# EAGLE board probe_v2 (EAGLE 6.4)
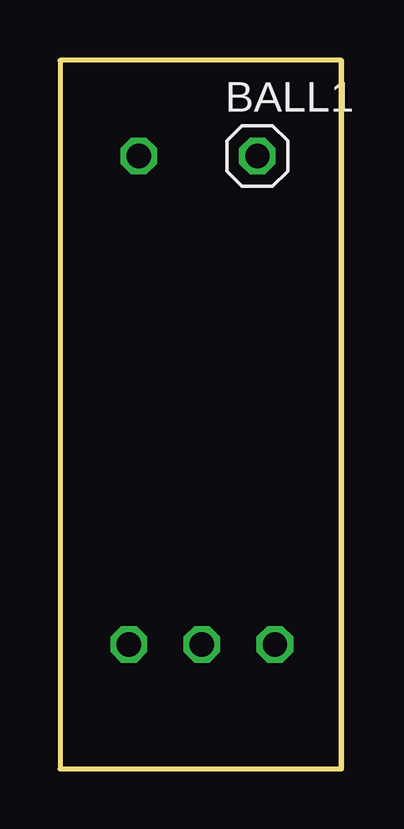
[diagram p0: board, top side]
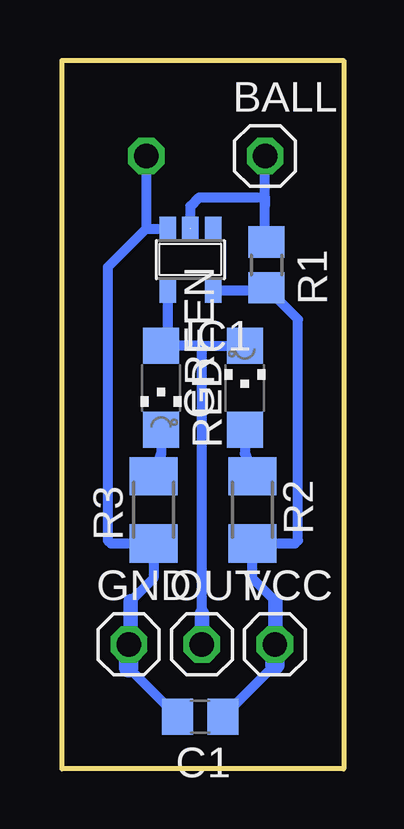
[diagram p1: board, bottom side, seen from below]

Size 11.84 x 29.54 mm. Coordinates in mm from the lower left corner, seen from the top.
Outline: 11.84,0 11.84,29.54 0,29.54 0,0
Copper layers (1*16): Top 0.035mm / dielectric 1.5mm / Bottom 0.035mm
Design rules "default": minimum track width 10mil, minimum drill 24mil, track to track 8mil, track to pad 8mil, pad to pad 8mil, via to via 8mil, smd to smd 8mil, copper to edge 40mil, drill to drill 8mil, minimum pad ring 10mil, minimum via ring 8mil, stop-mask expansion 4mil, vias tented up to drill 0mil, thermal gap 10mil
Net classes: 0 default: width 0.5 mm, drill 0.5 mm, clearance 0.355 mm
Milling: 4 lines

## Footprints (pad centres in the part's own frame; a part is rotated, then mirrored left to right if it is on the bottom)
1X01 = drill 1.016 octagon: 1 0,0
C0805 = smd 1.3 x 1.5: 1 -0.95,0; 2 0.95,0
CHIPLED_1206 = smd 1.5 x 1.5: A 0,-1.75; C 0,1.75
SOT23-5 = smd 0.69 x 0.99: 1 -0.95,-1.29; 2 0,-1.29; 3 0.95,-1.29; 4 0.95,1.3; 5 -0.95,1.3
R0805 = smd 1.3 x 1.5: 1 -0.95,0; 2 0.95,0
M1206 = smd 1.6 x 2: 1 -1.4,0; 2 1.4,0

## Placement (x,y rotation side)
BALL  [1X01]  3.29,25.54 0 bottom
BALL1  [1X01]  8.24,25.54 0 top
C1  [C0805]  5.99,2.17 180 bottom
GND  [1X01]  8.97,5.19 0 bottom
GREEN  [CHIPLED_1206]  4.13,15.88 0 bottom
IC1  74AHC1G14DBV  [SOT23-5]  6.4,21.23 180 bottom
OUT  [1X01]  5.92,5.19 0 bottom
R1  1k  [R0805]  3.22,21 270 bottom
R2  330  [M1206]  3.81,10.79 270 bottom
R3  330  [M1206]  7.94,10.79 90 bottom
RED  [CHIPLED_1206]  7.62,15.88 180 bottom
VCC  [1X01]  2.87,5.19 0 bottom

## Library data of the parts
BALL BALL1 GND OUT VCC = pinhead
C1 R1-R3 = rcl
GREEN RED = led
IC1 = 74xx-little-us

## Nets
BALL: BALL.1 IC1.2 R1.1
GND: BALL1.1 C1.2 GND.1 IC1.3 R3.1
N$1: GREEN.A R2.1
N$2: R3.2 RED.C
OUT: GREEN.C IC1.4 OUT.1 RED.A
VCC: C1.1 IC1.5 R1.2 R2.2 VCC.1

## Tracks (layer width: path | path; a pad name or v marks a point on that pad's centre or on a via)
BALL
  Bottom 0.406: R1.1 3.29,21.95 3.29,23.5 | 3.29,23.5 BALL.1 | IC1.2 6.4,23.45 6.03,23.81 3.29,23.81 3.29,23.5
GND
  Bottom 0.406: C1.2 8.97,4.21 | R3.1 7.94,7.94 8.89,6.99 | 8.89,5.19 GND.1 | BALL1.1 8.24,22.52 | 8.24,22.52 IC1.3 | R3.1 7.94,9.53 | 8.24,22.52 9.84,20.91 9.84,11.11 9.84,9.53 9.71,9.39 R3.1
  Bottom 0.61: 8.89,6.99 8.89,5.19
  Bottom 0.813: 8.97,4.21 GND.1
N$1
  Bottom 0.406: GREEN.A 4.13,13.15 R2.1
N$2
  Bottom 0.406: RED.C 7.62,13.15 R3.2
N$3
  Bottom 0.61: 5.92,5.19 5.92,6.49
OUT
  Bottom 0.406: 5.92,17.62 GREEN.C | IC1.4 7.35,17.62 RED.A 5.92,17.62 | OUT.1 5.92,17.62
VCC
  Bottom 0.406: 3.35,19.93 IC1.5 | C1.1 2.87,4.34 | 2.87,19.7 1.91,18.73 1.91,9.53 2.04,9.39 R2.2 3.81,7.94 2.86,6.99 | VCC.1 2.86,5.21
  Bottom 0.61: 2.87,19.7 R1.2 3.35,19.93 | 2.86,5.21 2.86,6.99
  Bottom 0.813: 2.87,4.34 VCC.1